# Allegro board NetWorkCalendar_PCB_V1.1.brd
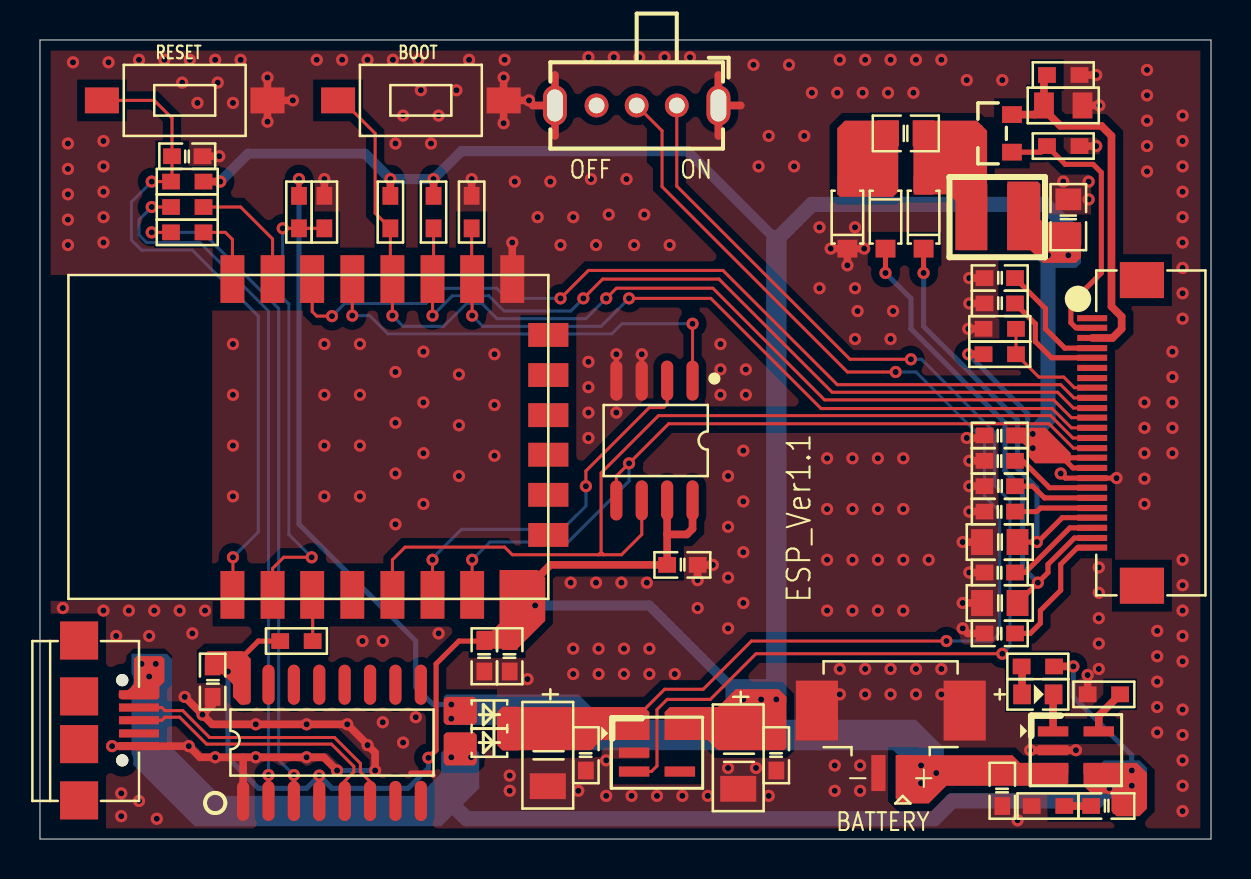
[diagram p0: board, top side]
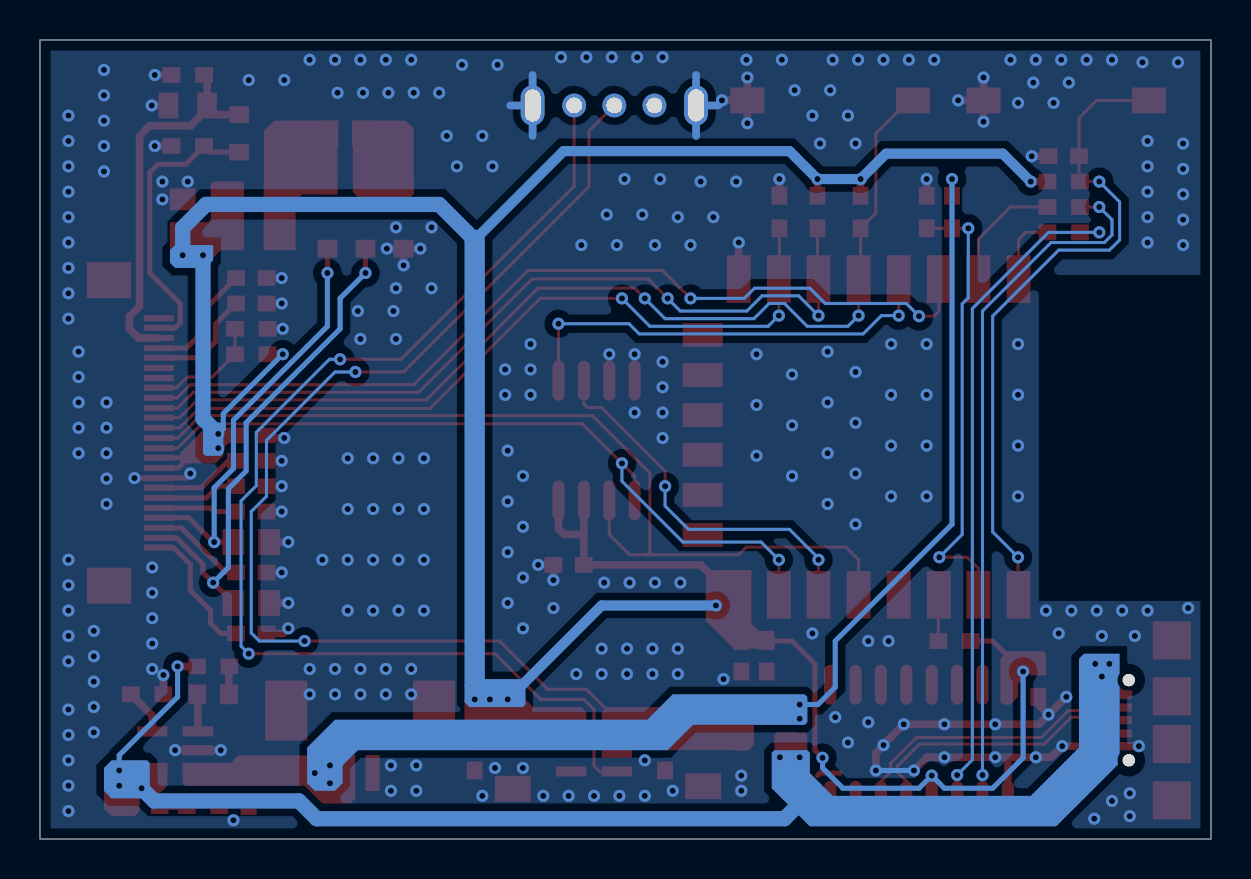
[diagram p1: board, bottom side, seen from below]

Outline 58.57 x 39.98 mm; copper layers: TOP, BOTTOM. Coordinates in mm from the lower left corner of the outline.
Outline path: 0,39.98 58.57,39.98 58.57,0 0,0 0,39.98

## Design rules (mm)
net group DIFFPAIR0: nets USB_DM USB_DP
net group PWR: nets VBAT VCC_3V3 VCOM VGH VGL VIN VSH VSL

## Placement (name value [footprint] x y rotation side)
C1  0.1uF/25V  [C0603]  23.5 9.14 270 top
C2  1uF/6.3V  [C0603]  22.23 9.14 270 top
C3  1uF/25V  [C0603]  53.34 1.65 180 top
C4  22uF/10V  [TA3216]  25.4 4.19 270 top
C5  0.1uF/25V  [C0603]  27.3 4.19 270 top
C6  1uF/25V  [C0603]  48.13 2.41 270 top
C7  0.1uF/25V  [C0603]  36.83 4.19 270 top
C8  22uF/10V  [TA3216]  34.92 4.06 270 top
C9  0.1uF/25V  [C0603]  32.13 13.72 180 top
C10  1uF/25V  [C0603]  48.01 26.8 180 top
C11  1uF/25V  [C0603]  48.01 18.92 0 top
C12  0.1uF/25V  [C0603]  48.01 20.19 0 top
C13  1uF/25V  [C0603]  48.01 16.38 0 top
C14  1uF/25V  [C0603]  48.01 13.34 0 top
C15  1uF/25V  [C0603]  48.01 10.29 0 top
C16  4.7uF/25V  [C0805]  51.44 31.11 270 top
C17  4.7uF/25V  [C0805]  43.31 35.31 180 top
C18  10uF/25V  [C0805]  48.01 11.81 0 top
C19  10uF/25V  [C0805]  48.01 14.86 0 top
C20  0.1uF/25V  [C0603]  8.64 7.87 90 top
C21  0.1uF/25V  [C0603]  7.37 34.16 0 top
C22  1uF/25V  [C0603]  48.01 28.07 180 top
C23  1uF/25V  [C0603]  48.01 17.65 180 top
D1  LED  [LED0603]  49.91 7.24 0 top
D2  SD103AWS-G  [SOD323]  22.48 4.83 0 top
D3  SD103AWS-G  [SOD323]  22.48 6.22 0 top
D4  MBR0530  [SOD123]  42.29 31.11 90 top
D5  MBR0530  [SOD123]  40.39 31.11 270 top
D6  MBR0530  [SOD123]  44.2 31.11 270 top
J1  FPC-24P  [FPC_0R5_2H_WS_24P_M]  55.12 20.32 90 top
J2  CON4  [1_25_PWT_2P]  42.49 6.05 180 top
KEY1  BOOT  [BUTTON_2P_SMD]  19.05 36.96 0 top
KEY2  RESET  [BUTTON_2P_SMD]  7.24 36.96 0 top
L1  10uH/1A  [SM3521]  47.88 31.11 180 top
NOREF  -  []  0 0 90 top
NOREF#2  -  []  0 39.98 0 top
Q1  Si1308EDL  [SOT23]  47.62 35.31 90 top
R1  510R  [R0603]  49.91 8.64 180 top
R2  4.7k  [R0603]  53.21 7.24 0 top
R3  1R  [R0603]  50.42 1.65 0 top
R4  10k  [R0603]  21.59 31.37 90 top
R5  10k  [R0603]  12.83 9.91 0 top
R6  10k  [R0603]  19.68 31.37 90 top
R7  10k  [R0603]  17.53 31.37 90 top
R8  4.7k  [R0603]  14.22 31.37 270 top
R9  47k  [R0603]  12.95 31.37 90 top
R10  0R  [R0603]  48.01 25.53 0 top
R11  NC  [R0603]  48.01 24.26 0 top
R12  10k  [R0603]  51.18 34.67 180 top
R13  0.47R  [R0805]  51.18 36.7 180 top
R14  10k/NC  [R0603]  51.18 38.23 180 top
R15  300R  [R0603]  7.37 30.35 180 top
R16  300R  [R0603]  7.37 31.62 180 top
R17  10k  [R0603]  7.37 32.89 180 top
SW1  SPDT-SW  [SK-12D02-VG3]  29.84 36.7 180 top
U1  -  [ESP8266]  23.62 28.02 270 top
U2  CYT5026  [SOT23-5]  51.82 4.45 270 top
U3  XC6228D332VR-G  [SOT23-5]  30.86 4.32 270 top
U4  GT21L16S2W  [SOIC-8]  30.73 19.94 270 top
U5  CH340C  [SOIC-16]  10.16 1.91 90 top
USB1  USB_MICRO  [USB-MICRO-5P]  4.95 7.24 270 top

## Library data of the parts
C1-C3 C5-C7 C9-C23 = CAP NP
C4 C8 = CAP TAC
D1 = LED
D2-D6 = DIADO
J1 = CON24
J2 = CON4
KEY1 KEY2 = BUTTON-2P
L1 = INDUCTANCE
Q1 = MOS_N_CHAN
R1-R17 = R
SW1 = SPDT-SW
U1 = ESP8266
U2 = CYT5026
U3 = XC6228D332VR-G
U4 = W25Q64_0
U5 = CH340G
USB1 = USB_MICRO

## Footprints (pads in the part's own frame, mm; a bottom-side part is the same pattern mirrored in y, then rotated)
1_25_PWT_2P
  rect 0.711x1.803 smd: 1(-0.686,2.743) 2(0.559,2.743)
  rect 2.108x2.997 smd: 3(-3.759,-0.381) 4(3.632,-0.381)
BUTTON_2P_SMD
  rect 1.702x1.295 smd: 1(-4.14,0) 2(4.14,0)
C0603
  rect 0.889x0.787 smd: 1(-0.762,0) 2(0.762,0)
C0805
  rect 1.092x1.295 smd: 1(-0.889,0) 2(0.889,0)
ESP8266
  rect 2.388x1.194 smd: 1(0,0) 2(0,-2.007) 3(0,-3.988) 4(0,-5.994) 5(0,-8.001) 6(0,-10.008) 7(0,-11.989) 8(0,-13.995) 9(15.799,-13.995) 10(15.799,-11.989) 11(15.799,-10.008) 12(15.799,-8.001) 13(15.799,-5.994) 14(15.799,-3.988) 15(15.799,-2.007) 16(15.799,0)
  rect 1.194x2.007 smd: 17(12.802,1.803) 18(10.795,1.803) 19(8.788,1.803) 20(6.807,1.803) 21(4.801,1.803) 22(2.794,1.803)
FPC_0R5_2H_WS_24P_M
  rect 1.803x2.21 smd: (-7.645,0) (7.645,0)
  rect 0.305x1.499 smd: 1(5.74,2.489) 2(5.258,2.489) 3(4.75,2.489) 4(4.242,2.489) 5(3.759,2.489) 6(3.251,2.489) 7(2.743,2.489) 8(2.261,2.489) 9(1.753,2.489) 10(1.245,2.489) 11(0.762,2.489) 12(0.254,2.489) 13(-0.254,2.489) 14(-0.762,2.489) 15(-1.245,2.489) 16(-1.753,2.489) 17(-2.261,2.489) 18(-2.743,2.489) 19(-3.251,2.489) 20(-3.759,2.489) 21(-4.242,2.489) 22(-4.75,2.489) 23(-5.258,2.489) 24(-5.74,2.489)
LED0603
  rect 0.889x0.991 smd: 1(-0.787,0) 2(0.787,0)
R0603
  rect 0.889x0.787 smd: 1(-0.813,0) 2(0.813,0)
R0805
  rect 0.991x1.295 smd: 1(-0.965,0) 2(0.965,0)
SK-12D02-VG3
  round 1.194 hole 0.787: 1(-2.007,0) 2(0,0) 3(2.007,0)
  oval 1.194x2.007 hole 0.787x1.6: 4(-4.089,0) 5(4.089,0)
SM3521
  rect 1.6x3.302 smd: 1(-1.295,0) 2(1.295,0)
SOD123
  rect 0.889x0.991 smd: 1(-1.575,0) 2(1.575,0)
SOD323
  rect 0.787x0.787 smd: 1(-1.067,0) 2(1.067,0)
SOIC-8
  oval 2.007x0.61 smd: 1(-2.997,1.905) 2(-2.997,0.635) 3(-2.997,-0.635) 4(-2.997,-1.905) 5(2.997,-1.905) 6(2.997,-0.635) 7(2.997,0.635) 8(2.997,1.905)
SOIC-16
  oval 2.007x0.61 smd: 1(0,0) 2(0,-1.27) 3(0,-2.54) 4(0,-3.81) 5(0,-5.08) 6(0,-6.35) 7(0,-7.62) 8(0,-8.89) 9(5.817,-8.89) 10(5.817,-7.62) 11(5.817,-6.35) 12(5.817,-5.08) 13(5.817,-3.81) 14(5.817,-2.54) 15(5.817,-1.27) 16(5.817,0)
SOT23
  rect 0.838x0.991 smd: 1(-0.94,-0.991) 2(0.94,-0.991) 3(0,0.991)
SOT23-5
  rect 0.508x1.524 smd: 1(-0.94,-1.143) 2(0,-1.143) 3(0.94,-1.143) 4(0.94,1.143) 5(-0.94,1.143)
TA3216
  rect 1.295x1.803 smd: 1(-1.549,0) 2(1.549,0)
USB-MICRO-5P
  rect 1.905x1.905 smd: (-2.692,-2.997) (0.102,-2.997) (2.489,-2.997) (5.309,-2.997)
  round 0.61 hole 0.61 unplated: (-0.711,-0.838) (3.302,-0.838)
  rect 0.406x2.007 smd: 1(0,0) 2(0.66,0) 3(1.295,0) 4(1.956,0) 5(2.591,0)

## Nets
GND: C1.2 C2.2 C4.2 C5.2 C6.2 C7.2 C8.2 C9.1 C10.2 C11.1 C12.1 C13.1 C14.1 C15.1 C16.1 C18.1 C19.1 C20.1 C21.2 C22.2 C23.2 D5.2(K) J1.17 J2.2 J2.3 J2.4 KEY1.2 KEY2.2 R2.1 R3.1 R4.2 R8.1 R10.1 R12.1 R13.1 R14.1 SW1.4 SW1.5 U1.1(GND) U2.2(GND) U3.2(VSS) U4.3(NC) U4.4(GND) U5.1(GND) USB1.5(GND)
VBAT: C6.1 D3.1(A) J2.1 R9.2 U2.3(VBAT)
VCC_3V3: C1.1 C2.1 C7.1 C8.1 C9.2 C12.2 C16.2 C20.2 J1.15 J1.16 L1.1 R5.1 R6.2 R7.2 R11.1 R17.1 U1.16(VCC) U3.5(VOUT) U4.7(HOLD) U4.8(VCC) U5.4(V3) U5.16(VCC)
VIN: C3.1 D2.1(A) R1.1 U2.4(VIN) USB1.1(VCC)
BAT_ADC: R8.2 R9.1 U1.10(ADC)
BS: J1.8 R10.2 R11.2
BUSY: J1.9 U1.6(GPIO4)
CH340_RXD: R15.2 U5.3(RXD)
CH340_TXD: R16.2 U5.2(TXD)
CHRG: D1.2(K) U2.1(\C\H\R\G\)
CLK: J1.13 U1.13(GPIO14) U4.6(CLK)
D/C: J1.11 KEY1.1 R7.1 U1.4(GPIO0)
EN: SW1.1 U3.3(EN)
ESP_EN: R5.2 U1.11(CH_PD)
ESP_RXD: R16.1 U1.7(RXD)
ESP_TXD: R15.1 U1.8(TXD)
GDR: J1.2 Q1.1(G) R12.2
IN: C4.1 C5.1 D2.2(K) D3.2(K) SW1.2 U3.1(VIN)
LCD_CS: J1.12 R4.1 U1.2(GPIO15)
MISO: U1.14(GPIO12) U4.2(DO)
MOSI: J1.14 U1.15(GPIO13) U4.5(DI)
PREVGH: C19.2 D6.2(K) J1.21
PREVGL: C18.2 D4.1(A) J1.23
RESE: J1.3 Q1.2(S) R13.2 R14.2
RESET: C21.1 KEY2.1 R17.2 U1.9(RESET)
RST: J1.10 R6.1 U1.3(GPIO2)
USB_DM: U5.6(D-) USB1.2(D-)
USB_DP: U5.5(D+) USB1.3(D+)
VCOM: C15.2 J1.24
VGH: C10.1 J1.5
VGL: C22.1 J1.4
VPP: C23.1 J1.19
VSH: C13.2 J1.20
VSL: C14.2 J1.22
WORDLIB_CS: U1.5(GPIO5) U4.1(C\S\)
N02131: D1.1(A) R1.2
N02329: R2.2 U2.5(PROG)
N03059: C3.2 R3.2
N11546: C11.2 J1.18
N14765: C17.1 D6.1(A) L1.2 Q1.3(D)
N15354: C17.2 D4.2(K) D5.1(A)

Pads without a net: J1 1 6 7; SW1 3; U1 12 17 18 19 20 21 22; U3 4; U5 7 8 9 10 11 12 13 14 15; USB1 4

## Via types
v1: diameter 0.61, hole 0.305, TOP to BOTTOM, 355 vias

## Routing (per net, layer and track width the routed paths; a pad name or vN(x,y) marks a point on that pad's centre or on a via; arc(x,y) is an arc through that point)
GND: length 82.5
  TOP w0.254: v1(53.85,18.06) J1.17 51.28,18.06 v1(51.05,18.29) ; U4.4 v1(28.83,24.26) ; 18.54,3.3 19.56,3.3 19.68,3.17 ; U4.3 v1(30.1,24.26)
  TOP w0.381: C11.1 v1(46.48,18.92) ; 24.64,36.7 SW1.5 ; SW1.5 25.76,38.23 ; SW1.5 25.76,35.18 ; R8.1 v1(14.22,33.02) ; 33.93,35.18 SW1.4 ; SW1.4 33.93,38.23 ; SW1.4 35.05,36.7 ; v1(14.86,3.43) 14.2,4.09 v1(13.34,4.09) v1(10.79,4.09) 10.16,4.09 ; C14.1 v1(46.48,13.34) ; C13.1 v1(46.48,16.38) ; D5.2 v1(40.39,28.7) ; D5.2 v1(39.55,29.54) ; D5.2 v1(41.22,29.54) ; C23.2 v1(46.48,17.65) ; KEY1.2 v1(23.19,35.81) ; KEY1.2 v1(23.19,38.1) ; KEY1.2 v1(24.46,36.96) ; v1(49.53,4.45) U2.2 v1(51.82,4.45) ; R14.1 v1(52.83,38.23) ; U1.1 v1(23.62,29.84) ; v1(8.13,6.22) 8.61,5.74 v1(10.79,5.74) v1(13.34,5.74) v1(15.37,5.74) 16.38,4.72 v1(16.38,4.7) 16.76,4.32 v1(16.76,3.43) ; v1(8.13,6.22) 8.64,6.73 C20.1 ; v1(8.13,6.22) v1(7.24,7.11) ; R12.1 v1(52.83,34.67) ; 10.16,4.09 v1(8.76,4.09) 8,4.09 v1(7.44,4.65) USB1.5 v1(3.61,4.65) ; 10.16,4.09 U5.1 ; C22.2 v1(46.48,28.07) ; v1(32.89,12.95) C9.1 v1(33.66,13.72) ; C19.1 v1(46.15,14.86) ; KEY2.2 v1(11.38,38.1) ; KEY2.2 v1(12.65,36.96) ; KEY2.2 v1(11.38,35.89) ; v1(46.15,10.54) 46.41,10.29 C15.1 ; R10.1 v1(46.43,25.53) ; R2.1 v1(52.4,8.2) ; C10.2 v1(46.48,26.8) ; R13.1 v1(52.98,36.7) ; C18.1 v1(46.15,11.81) ; C12.1 47.12,20.07 v1(46.35,20.07) ; C21.2 v1(8.97,34.16) ; R4.2 v1(21.59,33.02)
  BOTTOM w0.254: v1(14.86,3.43) v1(16.76,3.43)
  BOTTOM w0.381: 24.64,36.7 SW1.5 ; SW1.5 25.76,38.23 ; SW1.5 25.76,35.18 ; 33.93,35.18 SW1.4 ; SW1.4 33.93,38.23 ; SW1.4 35.05,36.7
  vias: v1(1.14,11.56) v1(1.4,34.8) v1(1.4,33.53) v1(1.4,32.26) v1(1.4,30.99) v1(1.4,29.72) v1(1.65,38.86) v1(3.17,34.92) v1(3.17,33.66) v1(3.17,32.38) v1(3.17,31.11) v1(3.17,29.84) v1(3.17,11.43) v1(3.43,38.86) v1(3.81,10.16) v1(4.06,2.29) v1(4.06,1.14) v1(4.45,11.43) v1(4.95,38.99) v1(4.95,1.91) v1(5.46,10.16) v1(5.71,11.43) v1(5.84,1.02) v1(6.22,38.99) v1(6.99,11.43) v1(7.11,37.85) v1(7.49,38.99) v1(7.62,10.29) v1(7.87,36.83) v1(8.26,11.43) v1(8.76,38.99) v1(8.89,37.85) v1(9.65,36.83) v1(9.65,24.77) v1(9.65,22.23) v1(9.65,19.68) v1(9.65,17.14) v1(10.03,38.99) v1(13.84,38.99) v1(14.22,24.77) v1(14.22,22.23) v1(14.22,19.68) v1(14.22,17.14) v1(15.11,38.99) v1(16,24.77) v1(16,22.23) v1(16,19.68) v1(16,17.14) v1(16.13,9.91) v1(16.38,38.99) v1(17.14,9.91) v1(17.14,5.84) v1(17.65,38.99) v1(17.78,34.8) v1(17.78,23.37) v1(17.78,20.83) v1(17.78,18.29) v1(17.78,15.75) v1(18.16,36.2) v1(18.16,4.83) v1(18.8,6.1) v1(18.92,38.99) v1(19.05,37.47) v1(19.18,24.38) v1(19.18,21.84) v1(19.18,19.3) v1(19.18,16.76) v1(19.56,34.8) v1(19.94,36.2) v1(19.94,10.29) v1(20.83,37.47) v1(20.95,23.24) v1(20.95,20.7) v1(20.95,18.16) v1(21.46,38.99) v1(22.73,24.26) v1(22.73,21.72) v1(22.73,19.18) v1(23.24,38.99) v1(23.5,3.17) v1(23.5,2.41) v1(23.75,32.89) v1(24.38,8) v1(24.89,31.11) v1(25.53,32.89) v1(26.04,29.72) v1(26.54,12.83) v1(26.67,31.11) v1(26.67,9.53) v1(26.67,8.26) v1(26.92,2.41) v1(27.43,39.12) v1(27.43,23.88) v1(27.43,22.61) v1(27.43,21.34) v1(27.43,20.07) v1(27.56,33.02) v1(27.81,29.72) v1(27.81,12.83) v1(27.94,9.53) v1(27.94,8.26) v1(28.32,3.94) v1(28.32,2.16) v1(28.45,31.24) v1(28.7,39.12) v1(28.83,21.34) v1(29.08,12.83) v1(29.21,9.53) v1(29.21,8.26) v1(29.34,33.02) v1(29.59,2.16) v1(29.72,29.72) v1(29.97,39.12) v1(30.23,31.24) v1(30.35,12.83) v1(30.48,9.53) v1(30.48,8.26) v1(30.86,2.16) v1(31.24,39.12) v1(31.5,29.72) v1(31.75,8.26) v1(32.13,2.16) v1(32.51,39.12) v1(32.89,11.56) v1(33.4,2.16) v1(34.04,24.77) v1(34.04,23.5) v1(34.04,22.23) v1(34.42,18.16) v1(34.42,15.62) v1(34.42,13.08) v1(34.42,10.54) v1(34.42,3.56) v1(35.18,19.43) v1(35.18,16.89) v1(35.18,14.35) v1(35.18,11.81) v1(35.31,23.5) v1(35.31,22.23) v1(35.69,38.73) v1(35.81,3.56) v1(35.94,33.66) v1(36.45,35.18) v1(36.45,2.16) v1(37.47,38.73) v1(37.72,33.66) v1(38.23,35.18) v1(38.61,37.34) v1(38.99,30.61) v1(38.99,27.56) v1(39.37,19.05) v1(39.37,16.51) v1(39.37,13.97) v1(39.37,11.43) v1(39.75,3.68) v1(39.75,2.41) v1(39.88,37.34) v1(40.01,38.99) v1(40.01,8.51) v1(40.01,7.24) v1(40.64,19.05) v1(40.64,16.51) v1(40.64,13.97) v1(40.64,11.43) v1(40.77,30.61) v1(40.77,27.56) v1(40.77,25.02) v1(40.89,26.42) v1(41.02,3.68) v1(41.02,2.41) v1(41.15,37.34) v1(41.27,38.99) v1(41.27,8.51) v1(41.27,7.24) v1(41.91,19.05) v1(41.91,16.51) v1(41.91,13.97) v1(41.91,11.43) v1(42.42,37.34) v1(42.55,38.99) v1(42.55,25.02) v1(42.55,8.51) v1(42.55,7.24) v1(42.67,26.42) v1(43.18,19.05) v1(43.18,16.51) v1(43.18,13.97) v1(43.18,11.43) v1(43.69,37.34) v1(43.81,38.99) v1(43.81,8.51) v1(43.81,7.24) v1(44.45,13.97) v1(45.09,38.99) v1(45.09,8.51) v1(45.09,7.24) v1(46.35,37.97) v1(48.13,37.97) v1(48.9,0.94) v1(51.18,32.89) v1(52.45,32.89) v1(52.45,32) v1(52.96,13.59) v1(52.96,12.32) v1(52.96,11.05) v1(52.96,9.78) v1(52.96,8.51) v1(55.24,21.84) v1(55.24,20.57) v1(55.24,19.3) v1(55.24,18.03) v1(55.24,16.76) v1(55.37,38.48) v1(55.37,37.21) v1(55.37,35.94) v1(55.37,34.67) v1(55.37,33.4) v1(55.88,10.41) v1(55.88,9.14) v1(55.88,7.87) v1(55.88,6.6) v1(55.88,5.33) v1(56.64,24.38) v1(56.64,23.11) v1(56.64,21.84) v1(56.64,20.57) v1(56.64,19.3) v1(57.15,36.2) v1(57.15,34.92) v1(57.15,33.66) v1(57.15,32.38) v1(57.15,31.11) v1(57.15,29.84) v1(57.15,28.57) v1(57.15,27.3) v1(57.15,26.04) v1(57.15,13.97) v1(57.15,12.7) v1(57.15,11.43) v1(57.15,10.16) v1(57.15,8.89) v1(57.15,6.48) v1(57.15,5.21) v1(57.15,3.94) v1(57.15,2.67) v1(57.15,1.4)
VBAT: length 30.8
  TOP w0.254: R9.2 v1(12.95,33.02)
  BOTTOM w0.254: v1(12.95,33.02) 12.95,15.75 18.8,9.91 18.8,7.59 19.66,6.73 v1(20.57,6.73)
  vias: v1(20.57,6.02) v1(44.07,3.68) v1(44.07,2.79) v1(44.83,3.3)
VCC_3V3: length 144.2
  TOP w0.254: J1.16 51.66,18.57 51.16,19.08 J1.15 ; C2.1 20.95,9.91 19.81,8.76 19.81,4.45 v1(19.43,4.06) ; U5.4 v1(13.97,3.17) ; R5.1 10.92,9.91 10.16,9.14
  TOP w0.381: 31.37,15.24 C9.2 25.53,13.72 24.77,12.95 ; 31.37,15.24 32.36,15.24 32.64,15.52 U4.8 ; 31.37,15.24 31.37,16.94 ; R11.1 v1(46.43,24.26) ; R17.1 v1(9.02,32.89) ; R6.2 v1(19.68,33.02) ; R7.2 v1(17.53,33.02)
  BOTTOM w0.254: v1(49.66,20.27) 49.4,20.52 49.4,21.29 v1(46.43,24.26) ; v1(19.43,4.06) 19.43,3.56 18.41,2.54 14.61,2.54 v1(13.97,3.17) 13.34,2.54 10.92,2.54 9.4,4.06 v1(9.4,8.38)
  BOTTOM w0.508: v1(9.02,32.89) 10.41,34.29 16.26,34.29 v1(17.53,33.02) v1(19.68,33.02) 21.08,34.42 32.38,34.42 36.83,29.97 ; v1(35.18,6.99) 30.48,11.68 v1(24.77,11.68)
  BOTTOM w0.762: v1(50.42,29.21) 50.42,21.03 49.99,20.6 ; 36.83,29.97 38.61,31.75 50.27,31.75 51.44,30.58 v1(51.44,29.21)
  BOTTOM w1.016: 36.83,29.97 36.83,7.75
  vias: v1(36.07,6.99) v1(36.83,6.99) v1(49.66,19.56)
VIN: length 41.4
  TOP w0.381: v1(51.69,8.64) R1.1
  BOTTOM w0.254: v1(54.61,3.43) 54.61,4.19 51.69,7.11 v1(51.69,8.64)
  BOTTOM w0.762: v1(53.49,2.54) 52.86,1.91 45.62,1.91 44.73,1.02 21.34,1.02 20.45,1.91
  vias: v1(5.08,8.76) v1(5.46,8.13) v1(5.79,8.76) v1(20.57,4.09) v1(21.56,4.09) v1(54.61,2.67)
BAT_ADC: length 22.6
  TOP w0.152: U1.10 11.63,13.54 12.19,14.1 v1(13.59,14.1) ; v1(12.14,30.56) R9.1 R8.2
  BOTTOM w0.152: v1(12.14,30.56) 12.14,27.08 12.45,26.77 12.45,15.24 v1(13.59,14.1)
BS: length 5.8
  TOP w0.152: R10.2 R11.2 49.96,23.11 51.21,23.11 51.74,22.58 J1.8
BUSY: length 44.7
  TOP w0.152: v1(14.61,26.16) 13.84,26.16 13.61,26.39 U1.6 ; v1(26.04,27.05) 27.43,28.45 34.16,28.45 39.88,22.73 51.05,22.73 51.71,22.07 J1.9
  BOTTOM w0.152: v1(14.61,26.16) 15.24,26.8 19.3,26.8 20.07,27.56 22.83,27.56 23.34,27.05 v1(26.04,27.05)
CH340_RXD: length 33.8
  TOP w0.152: R15.2 v1(5.59,30.35) ; U5.3 v1(12.7,3.2)
  BOTTOM w0.152: v1(5.59,30.35) 8.13,30.35 11.94,26.54 11.94,3.96 v1(12.7,3.2)
CH340_TXD: length 35.2
  TOP w0.152: R16.2 v1(5.59,31.62) ; U5.2 v1(11.43,3.2)
  BOTTOM w0.152: v1(5.59,31.62) 4.95,30.99 4.95,30.23 5.33,29.84 8,29.84 11.43,26.42 v1(11.43,3.2)
CHRG: length 1.9
  TOP w0.381: U2.1 50.67,7.21 D1.2
CLK: length 47.3
  TOP w0.152: U4.6 30.1,15.24 29.08,14.22 28.19,14.22 ; 27.94,14.22 23.62,14.22 23.24,14.61 18.26,14.61 17.63,13.97 U1.13 ; 27.94,14.22 28.19,14.22 ; 27.94,14.22 28.02,14.3 28.07,14.3 ; 28.19,14.22 28.12,14.3 28.07,14.3 ; 28.07,14.3 28.07,18.31 30.94,21.18 50.55,21.18 51.66,20.07 J1.13
D/C: length 51.3
  TOP w0.152: v1(17.63,26.19) U1.4 17.53,28.12 R7.1 16.76,31.32 16.76,35.31 15.11,36.96 KEY1.1 ; v1(28.32,27.05) 28.83,27.56 33.66,27.56 39.24,21.97 50.7,21.97 51.59,21.08 J1.11
  BOTTOM w0.152: v1(28.32,27.05) 27.3,26.04 22.86,26.04 22.1,26.8 21.34,26.8 20.19,25.65 18.16,25.65 v1(17.63,26.19)
EN: length 59.1
  TOP w0.152: v1(48.13,9.27) 35.81,9.27 33.53,6.99 31.37,6.99 30.86,6.48 30.86,3.66 30.58,3.38 U3.3 ; SW1.1 31.85,32.66 40.51,24 v1(43.56,24)
  BOTTOM w0.152: v1(43.56,24) 44.09,24 47.75,20.35 47.75,17.68 48.51,16.92 48.51,9.65 v1(48.13,9.27)
ESP_EN: length 2.3
  TOP w0.152: U1.11 13.64,12.19 R5.2
ESP_RXD: length 6.1
  TOP w0.152: R16.1 10.03,31.62 11.63,30.02 U1.7
ESP_TXD: length 3.6
  TOP w0.152: U1.8 9.63,30 9.27,30.35 R15.1
GDR: length 14.5
  TOP w0.254: Q1.1 50.06,34.37 R12.2 51.28,33.76 52.68,33.76 53.09,33.35 53.09,28.32 51.56,26.8 51.56,25.83 51.82,25.58 J1.2
IN: length 55.5
  TOP w0.152: v1(42.8,23.37) 40.39,23.37 31.11,32.64 31.11,35.43 SW1.2 ; v1(45.34,9.91) 35.59,9.91 33.17,7.49 31.24,7.49 30.1,6.35
  BOTTOM w0.152: v1(42.8,23.37) 43.81,23.37 47.24,19.94 47.24,17.14 48.01,16.38 48.01,10.31 47.6,9.91 v1(45.34,9.91)
LCD_CS: length 38.9
  TOP w0.152: R4.1 21.59,28.04 U1.2 v1(21.62,26.19) ; J1.12 51.59,20.57 50.62,21.54 39.07,21.54 33.55,27.05 v1(29.46,27.05)
  BOTTOM w0.152: v1(29.46,27.05) 28.07,25.65 22.15,25.65 v1(21.62,26.19)
MISO: length 19
  TOP w0.152: 31.37,22.94 31.37,21.77 31.19,21.59 30.48,21.59 27.3,18.41 v1(27.3,17.65) ; v1(19.63,13.97) U1.14
  BOTTOM w0.152: v1(27.3,17.65) 27.3,16.66 26.14,15.49 21.08,15.49 19.63,14.05 v1(19.63,13.97)
MOSI: length 38.7
  TOP w0.152: v1(21.62,13.97) U1.15 ; U4.5 28.83,18.16 v1(29.46,18.8) 31.45,20.78 50.47,20.78 51.69,19.56 J1.14
  BOTTOM w0.152: v1(29.46,18.8) 29.46,17.91 26.42,14.86 22.5,14.86 v1(21.62,13.97)
PREVGH: length 21.3
  TOP w0.254: C19.2 v1(49.86,14.86) 49.91,14.86 51.13,16.08 J1.21 ; D6.2 v1(44.2,28.32)
  BOTTOM w0.254: v1(49.86,14.86) 49.86,17.58 48.9,18.54 48.9,20.95 44.2,25.65 v1(44.2,28.32)
PREVGL: length 25.2
  TOP w0.254: D4.1 v1(42.29,28.32) ; J1.23 51.74,15.06 50.42,13.74 50.42,13.34 v1(49.91,12.83) C18.2
  BOTTOM w0.254: v1(49.91,12.83) 49.15,13.59 49.15,17.53 48.26,18.41 48.26,20.83 43.56,25.53 43.56,27.05 v1(42.29,28.32)
RESE: length 19
  TOP w0.381: R13.2 49.76,36.25 Q1.2 ; R13.2 50.22,36.5 51.03,35.69 53.09,35.69 53.59,35.18 53.59,26.64 54.1,26.14 54.1,25.53 53.64,25.07 J1.3 ; R13.2 50.22,38.07 R14.2
RESET: length 33.8
  TOP w0.152: U1.9 9.65,12.24 v1(9.65,14.1) ; KEY2.1 5.71,36.96 6.6,36.07 C21.1 6.6,32.94 R17.2 v1(5.59,32.89)
  BOTTOM w0.152: v1(5.59,32.89) 4.57,31.88 4.57,29.97 5.08,29.46 7.62,29.46 10.92,26.16 10.92,15.37 v1(9.65,14.1)
RST: length 41.4
  TOP w0.152: J1.10 51.69,21.56 50.9,22.35 39.62,22.35 33.96,28.02 28.14,28.02 v1(27.18,27.05) ; R6.1 19.68,28.07 U1.3 v1(19.63,26.19)
  BOTTOM w0.152: v1(19.63,26.19) 20.62,27.18 22.45,27.18 23.22,26.42 26.54,26.42 v1(27.18,27.05)
USB_DM: length 14.3
  TOP w0.152: USB1.2 6.1,6.58 6.25,6.43 7.14,6.43 8.48,5.08 14.73,5.08 16.03,3.78 16.03,3.35 16.51,2.87 U5.6
USB_DP: length 13.7
  TOP w0.152: U5.5 15.24,2.9 15.7,3.35 15.7,3.63 14.58,4.75 8.33,4.75 6.99,6.1 6.25,6.1 6.1,5.94 USB1.3
VCOM: length 6.8
  TOP w0.254: J1.24 51.89,14.58 51.05,13.74 51.05,12.45 50.04,11.43 50.04,10.79 49.53,10.29 C15.2
VGH: length 5.5
  TOP w0.254: J1.5 50.6,24.08 49.78,24.89 49.78,25.78 C10.1
VGL: length 5.9
  TOP w0.254: C22.1 50.29,26.54 50.29,25.53 51.26,24.56 J1.4
VPP: length 4.1
  TOP w0.254: J1.19 50.24,17.07 49.66,17.65 C23.1
VSH: length 3.9
  TOP w0.254: J1.20 50.04,16.56 49.86,16.38 C13.2
VSL: length 4.8
  TOP w0.254: J1.22 51.51,15.57 49.28,13.34 C14.2
WORDLIB_CS: length 22.3
  TOP w0.152: U4.1 v1(32.64,25.78) ; U1.5 v1(15.62,26.19)
  BOTTOM w0.152: v1(15.62,26.19) 16.48,26.19 17.4,25.27 28.6,25.27 29.11,25.78 v1(32.64,25.78)
N02131: length 1.4
  TOP w0.381: R1.2 49.12,8.61 D1.1
N02329: length 2.3
  TOP w0.381: R2.2 52.96,6.17 U2.5
N03059: length 1.3
  TOP w0.381: R3.2 C3.2
N11546: length 4.4
  TOP w0.254: J1.18 50.5,17.58 49.15,18.92 C11.2

## Copper pours and planes (outline as drawn; the poured copper is in the pictures)
GND on TOP: 0.53,0.53 0.53,39.45 58.04,39.45 58.04,0.53 ; 8 cut-outs
GND on BOTTOM: 0.53,0.53 0.53,39.45 58.04,39.45 58.04,0.53
VBAT on TOP (solid shape): 21.84,6.99 21.84,5.84 21.72,5.71 20.32,5.71 20.19,5.84 20.19,6.99 20.32,7.11 21.72,7.11
VBAT on TOP (solid shape): 49.02,3.81 51.44,3.81 51.44,2.79 51.31,2.67 45.34,2.67 44.45,1.78 43.05,1.78 42.8,2.03 42.8,4.19 48.64,4.19
VBAT on BOTTOM (solid shape): 28.19,5.97 43.81,5.97 45.21,4.57 45.21,2.79 44.83,2.41 43.81,2.41 43.43,2.79 43.43,3.68 42.67,4.45 27.18,4.45 25.91,5.71 20.32,5.71 20.19,5.84 20.19,7.11 20.32,7.24 26.92,7.24
VCC_3V3 on TOP (solid shape): 25.27,13.08 25.27,10.92 23.88,9.53 21.84,9.53 21.84,10.41 22.61,10.41 22.99,10.79 22.99,13.46 24.89,13.46
VCC_3V3 on TOP (solid shape): 51.56,19.3 51.56,18.92 51.44,18.8 49.78,18.8 49.4,19.18 49.4,19.56 49.15,19.81 48.39,19.81 48.39,20.57 50.29,20.57
VCC_3V3 on TOP (solid shape): 10.54,9.02 10.54,6.86 10.41,6.73 10.03,6.73 9.65,7.11 9.65,7.75 9.14,8.26 8.26,8.26 8.26,9.27 8.38,9.4 10.16,9.4
VCC_3V3 on TOP (solid shape): 37.34,7.11 37.34,4.57 37.21,4.45 33.91,4.45 33.4,4.95 31.24,4.95 31.24,6.35 31.5,6.6 33.91,6.6 34.8,7.49 36.96,7.49
VCC_3V3 on TOP (solid shape): 50.04,32.77 50.04,30.99 50.16,30.86 52.07,30.86 52.07,29.08 51.82,28.83 50.16,28.83 49.53,29.46 48.39,29.46 48.39,32.89 49.91,32.89
VCC_3V3 on BOTTOM (solid shape): 52.07,29.46 52.07,28.83 51.82,28.57 50.29,28.57 49.91,28.96 49.91,29.72 51.82,29.72
VCC_3V3 on BOTTOM (solid shape): 37.34,7.75 37.34,6.86 37.08,6.6 34.42,6.6 34.29,6.73 34.29,7.87 34.42,8 37.08,8
VCC_3V3 on BOTTOM (solid shape): 50.42,20.7 50.42,19.3 50.29,19.18 49.53,19.18 49.4,19.3 49.4,20.7 49.53,20.83 50.29,20.83
VIN on TOP (solid shape): 21.84,5.21 21.84,3.81 21.72,3.68 20.32,3.68 20.19,3.81 20.19,5.21 20.32,5.33 21.72,5.33
VIN on TOP (solid shape): 55.37,3.3 55.37,1.52 54.99,1.14 53.85,1.14 53.59,1.4 53.59,2.29 52.58,2.29 52.2,2.67 52.2,3.81 54.86,3.81
VIN on TOP (solid shape): 6.22,9.02 6.22,7.87 5.97,7.62 5.97,7.11 5.84,6.99 4.06,6.99 3.94,7.11 3.94,7.29 3.97,7.36 4.04,7.39 4.32,7.43 4.55,7.59 4.7,7.75 4.7,9.02 4.83,9.14 6.1,9.14
VIN on BOTTOM (solid shape): 55.37,3.56 55.37,2.41 54.99,2.03 53.34,2.03 53.09,2.29 53.09,3.81 53.21,3.94 54.99,3.94
VIN on BOTTOM (solid shape): 6.6,9.02 6.6,4.57 9.02,2.16 18.92,2.16 20.07,3.3 20.07,4.32 20.19,4.45 21.84,4.45 21.97,4.32 21.97,2.54 20.07,0.64 7.75,0.64 4.65,3.73 4.65,3.76 4.67,4.02 4.57,4.27 4.57,7.62 4.68,7.95 4.57,8.28 4.57,9.27 6.35,9.27
IN on TOP (solid shape): 30.48,6.35 30.48,4.95 28.07,4.95 27.56,4.45 23.11,4.45 22.86,4.7 22.86,6.35 23.11,6.6 30.23,6.6
N14765 on TOP (solid shape): 47.37,35.43 47.37,29.46 45.97,29.46 45.85,29.59 45.85,31.88 45.47,32.26 43.81,32.26 43.69,32.38 43.69,35.94 46.86,35.94
N15354 on TOP (solid shape): 42.93,32.38 42.67,32.13 40.01,32.13 39.88,32.26 39.88,35.56 40.26,35.94 42.93,35.94

## Text on the board
Ref Des/Silkscreen Top: RESET | BOOT | OFF | ON | BATTERY | - | + | ESP_Ver1.1
NCLEGEND-1-2: FIGURE | SIZE | 12.0 | 31.0 | 24.0 | 63.0x31.0 | DRILL CHART: TOP to BOTTOM | ALL UNITS ARE IN MILS | PLATED | NON-PLATED | QTY | 359 | 3 | 2
